# EAGLE board FTDI Basic-5V (EAGLE 9.0.0)
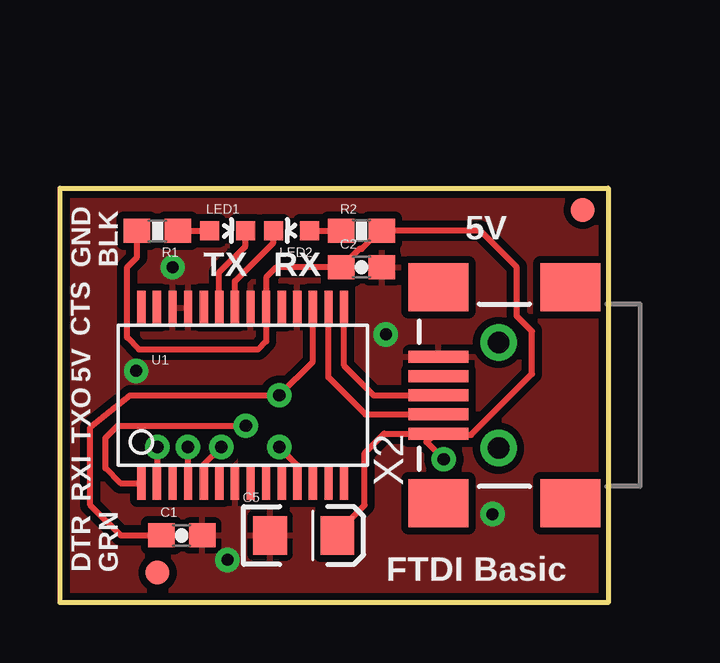
[diagram p0: board, top side]
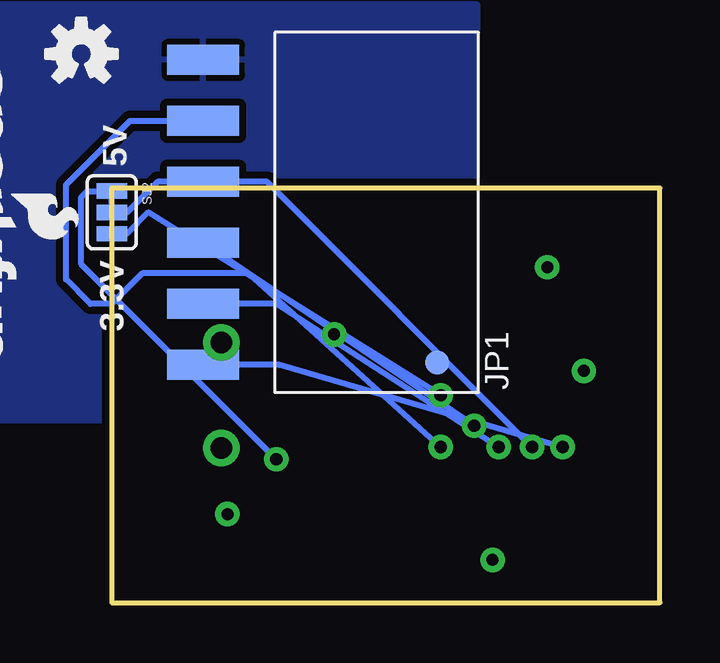
[diagram p1: board, bottom side, seen from below]

Size 22.86 x 17.27 mm. Coordinates in mm from the lower left corner, seen from the top.
Outline: 0,17.27 22.86,17.27 22.86,0 0,0 0,17.27
Copper layers (1*16): Top 0.035mm / dielectric 1.5mm / Bottom 0.035mm
Design rules "SparkFun": minimum track width 8mil, minimum drill 20mil, track to track 8mil, track to pad 8mil, pad to pad 8mil, via to via 8mil, smd to smd 8mil, copper to edge 8mil, drill to drill 8mil, minimum pad ring 12mil, minimum via ring 10mil, stop-mask expansion 4mil, vias tented up to drill 20mil, thermal gap 10mil
Net classes: 0 default: width 0.203 mm; 1 power: width 0.254 mm

## Footprints (pad centres in the part's own frame; a part is rotated, then mirrored left to right if it is on the bottom)
0603-CAP = smd 1.1 x 1: 1 -0.85,0; 2 0.85,0
EIA3216 = smd 1.4 x 1.6: A 1.4,0; C -1.4,0
1X06-SMD-FEMALE-V2 = smd 1.25 x 3: 1 6.35,3.425; 2 3.81,3.425; 3 1.27,3.425; 4 -1.27,3.425; 5 -3.81,3.425; 6 -6.35,3.425
FIDUCIAL-1X2 = smd 1 x 1: 1 0,0
LED-0603 = smd 0.8 x 0.8: A 0,-0.75; C 0,0.75
0603-RES = smd 1.1 x 1: 1 -0.85,0; 2 0.85,0
SJ_3 = smd 0.635 x 1.27: 1 -0.889,0; 2 0,0; 3 0.889,0
SSOP28DB = smd 0.348 x 1.397: 1 -4.225,-3.656; 2 -3.575,-3.656; 3 -2.925,-3.656; 4 -2.275,-3.656; 5 -1.625,-3.656; 6 -0.975,-3.656; 7 -0.325,-3.656; 8 0.325,-3.656; 9 0.975,-3.656; 10 1.625,-3.656; 11 2.275,-3.656; 12 2.925,-3.656; 13 3.575,-3.656; 14 4.225,-3.656; 15 4.225,3.656; 16 3.575,3.656; 17 2.925,3.656; 18 2.275,3.656; 19 1.625,3.656; 20 0.975,3.656; 21 0.325,3.656; 22 -0.325,3.656; 23 -0.975,3.656; 24 -1.625,3.656; 25 -2.275,3.656; 26 -2.925,3.656; 27 -3.575,3.656; 28 -4.225,3.656
USB-MINIB-NOSTOP = smd 2.5 x 0.5: D+ 2.5,0; D- 2.5,0.8; GND 2.5,-1.6; ID 2.5,-0.8; VBUS 2.5,1.6 | smd 2.5 x 2: G1 -3,-4.5; G2 -3,4.5; G3 2.5,4.5; G4 2.5,-4.5 | drill 0.9 pad 0.8: H1 0,2.2 | drill 0.9 pad 0.787: H2 0,-2.2

## Placement (x,y rotation side)
C1  0.1uF  [0603-CAP]  5.08,2.79 0 top
C2  0.1uF  [0603-CAP]  12.57,13.97 0 top
C5  10uF  [EIA3216]  10.16,2.79 0 top
FRAME1  FRAME-LETTER  [CREATIVE_COMMONS]  -1.96,-2.54 0 top
JP1  [1X06-SMD-FEMALE-V2]  15.62,16.26 90 bottom
JP2  LOGO-SFESK  [SFE-LOGO-FLAME]  27.05,17.02 270 bottom  (outside the outline)
JP3  FIDUCIAL1X2  [FIDUCIAL-1X2]  4.06,1.24 0 top
JP4  FIDUCIAL1X2  [FIDUCIAL-1X2]  21.79,16.36 0 top
JP5  FIDUCIAL1X2  [FIDUCIAL-1X2]  9.3,10.01 0 bottom
JP6  FIDUCIAL1X2  [FIDUCIAL-1X2]  29.41,23.98 0 bottom  (outside the outline)
LED1  Red  [LED-0603]  6.99,15.49 270 top
LED2  Green  [LED-0603]  9.65,15.49 90 top
LOGO1  OSHW-LOGOS  [OSHW-LOGO-S]  24.13,22.86 0 bottom  (outside the outline)
R1  1K  [0603-RES]  4.06,15.49 180 top
R2  1K  [0603-RES]  12.57,15.49 0 top
SJ2  [SJ_3]  22.86,16.26 270 bottom
U1  FT232RLSSOP  [SSOP28DB]  7.62,8.64 0 top
U$2  LOGO-SFENW2  [SFE-NEW-WEB]  29.97,22.35 270 bottom  (outside the outline)
X2  USB-SMD-NS  [USB-MINIB-NOSTOP]  18.29,8.64 180 top

## Library data of the parts
C1 C2 C5 JP1-JP6 LED1 LED2 R1 R2 SJ2 U1 U$2 X2 = SparkFun
FRAME1 LOGO1 = SparkFun-Aesthetics

## Nets
3.3V [power]: C1.1 SJ2.3 U1.17
5V: C2.1 C5.A R1.2 R2.2 SJ2.1 U1.20 X2.VBUS
CTS: JP1.2 U1.11
DTR: JP1.6 U1.2
GND [power]: C1.2 C2.2 C5.C JP1.1 U1.7 U1.18 U1.21 U1.25 U1.26 X2.GND
N$1: LED1.A R1.1
N$2: LED2.A R2.1
POWER: JP1.3 SJ2.2 U1.4
RXI: JP1.5 U1.5
RXLED: LED2.C U1.22
TXLED: LED1.C U1.23
TXO: JP1.4 U1.1
USB_D+: U1.15 X2.D+
USB_D-: U1.16 X2.D-

## Tracks (layer width: path | path; a pad name or v marks a point on that pad's centre or on a via)
3.3V  (via drill 0.51)
  Top 0.254: C1.1 2.54,2.79 1.27,4.06 1.27,7.3 2.92,8.64 v9.14,8.64 10.54,10.04 U1.17
  Bottom 0.254: SJ2.3 22.23,15.37 21.34,16.26 v9.14,8.64
5V  (via drill 0.51)
  Top 0.254: X2.VBUS 16.56,7.04 16.61,6.99 17.14,6.99 19.68,9.53 19.68,11.3 19.05,11.94 19.05,13.97 17.53,15.49 R2.2 13.34,15.49 12.57,14.73 12.48,14.73 C2.1 9.02,13.97 8.6,13.55 U1.20 8.6,10.88 8.26,10.54 3.3,10.54 2.79,11.05 2.79,13.97 3.21,14.39 R1.2 | X2.VBUS 15.28,6.69 v16,5.97 | C5.A 11.56,2.92 12.7,4.06 12.7,6.22 13.51,7.04 X2.VBUS
  Bottom 0.254: SJ2.1 23.88,17.14 24.13,16.89 24.13,14.1 v16,5.97
CTS  (via drill 0.51)
  Top 0.254: U1.11 9.89,5.73 v9.14,6.48
  Bottom 0.254: JP1.2 22.1,20.07 24.77,17.4 24.77,13.46 23.75,12.45 22.86,12.45 21.59,13.72 17.14,13.72 v9.14,6.48
DTR  (via drill 0.51)
  Top 0.254: U1.2 4.06,5 v4.06,6.48
  Bottom 0.254: JP1.6 15.88,9.91 v4.06,6.48
GND  (via drill 0.51)
  other vias: 18.03,3.68 4.7,13.97 3.17,9.65 6.99,1.78 13.59,11.18
  pour Bottom (isolate 0.305): 7.62,7.59 7.62,24.92 30.48,24.92 30.48,7.59
  pour Top (isolate 0.305): 0,-0.03 0,17.3 22.86,17.3 22.86,-0.03
N$1
  Top 0.254: R1.1 LED1.A
N$2
  Top 0.254: LED2.A R2.1
POWER  (via drill 0.51)
  Top 0.254: v5.33,6.48 5.33,4.99 U1.4
  Bottom 0.254: 22.86,17.02 SJ2.2 22.23,16.26 20.96,17.53 JP1.3 16.38,17.53 v5.33,6.48
RXI  (via drill 0.51)
  Top 0.254: U1.5 6,5.74 v6.73,6.48
  Bottom 0.254: v6.73,6.48 16,12.45 JP1.5
RXLED
  Top 0.254: U1.22 7.29,13.39 8.9,15 LED2.C
TXLED
  Top 0.254: LED1.C 7.74,14.85 6.65,13.76 U1.23
TXO  (via drill 0.51)
  Top 0.254: U1.1 2.51,4.98 1.91,5.59 1.91,6.86 2.41,7.37 v7.75,7.37
  Bottom 0.254: v7.75,7.37 JP1.4
USB_D+
  Top 0.254: X2.D+ 13.08,8.64 11.84,9.87 U1.15
USB_D-
  Top 0.254: X2.D- 12.74,7.84 11.2,9.38 U1.16

## Text on the board
Bottom: v24
tPlace: 5V | GND | BLK | TX | RX | CTS | 5V | TXO | RXI | DTR | GRN | FTDI Basic
bPlace: 5V | 3.3V
tValues: Close
Document: P. Dokter, T. Klopfenstein